# Altium PCB MPPT.PcbDoc
Units mil, origin at the board's own origin, x right, y up, seen from the top; angles counter-clockwise.
Board outline 6000 x 4000 mil, 2 copper layers (Top Layer, Bottom Layer); 77 components, 41 nets, 232 pads, 0 vias.
Unrouted connection lines stored in the file: 164.
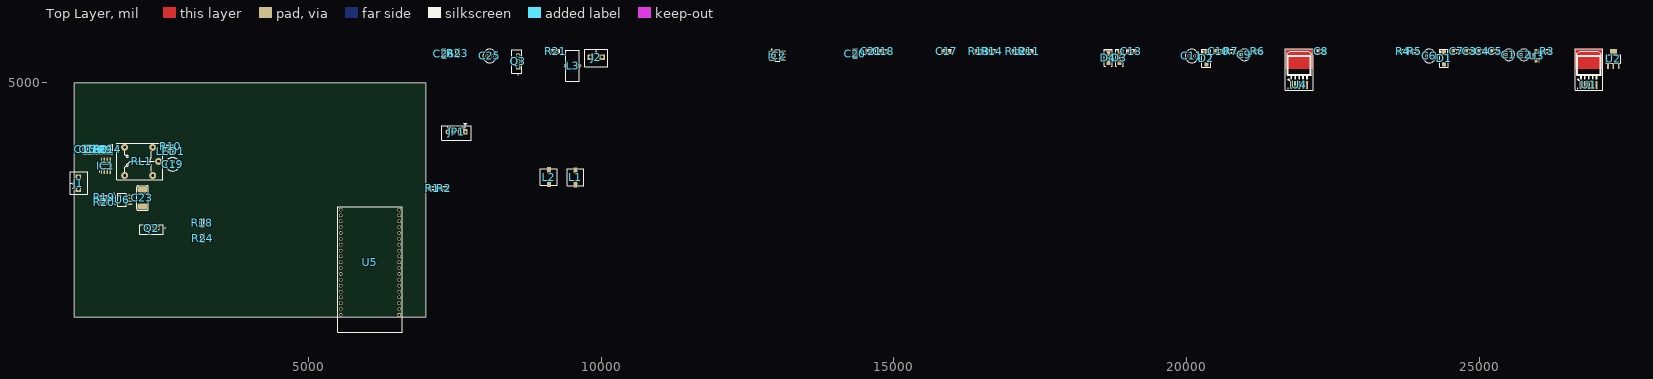
[diagram p0: Top Layer view]
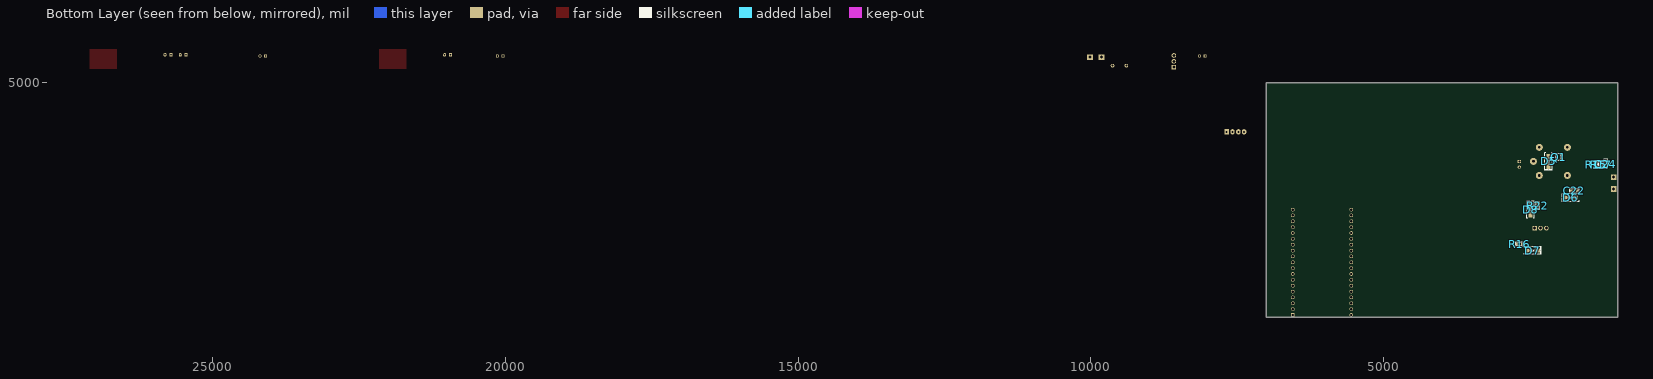
[diagram p1: Bottom Layer view, seen from below]

## Layer stack, top to bottom
Top Solder: solder mask 0.4, Solder Resist, Dk 3.5
Top Layer: signal copper 1.4
Dielectric 1: dielectric 12.6, FR-4, Dk 4.8
Bottom Layer: signal copper 1.4
Bottom Solder: solder mask 0.4, Solder Resist, Dk 3.5

## Board outline
1000,1000 7000,1000 7000,5000 1000,5000

## Design rules (kind name [scope] priority, off if disabled: settings)
Clearance [All] p1: gap=10 ignorepadtopadclearanceinfootprint=FALSE except(0: Arc-Hole Track-Hole SMDPad-SMDPad SMDPad-Hole THPad-Hole Via-Hole Fill-Hole Poly-Hole Region-Hole Text-Hole)
PolygonConnect [All] p1: connectstyle=Relief reliefconductorwidth=10 reliefentries=4 polygonreliefangle="90 Angle" airgapwidth=10
RoutingVias [All] p1: holewidth=28 width=50 viastyle="Through Hole" minholewidth=28 minwidth=50 maxholewidth=28 maxwidth=50
SolderMaskExpansion [All] p1: expansion=4 istentingtop=FALSE
Width [All] p1: maxlimit=10 minlimit=10 preferedwidth=10
30 further rules are at their usual default settings.

## Components (designator, comment, footprint, x,y, rotation, side; value= is the part's Value field where it differs from the comment)
C1 "220uF" C5mm 25500,5480 r0 top
C2 "220uF" C5mm 25760,5480 r0 top
C3 "100nF" CAP_0805 24830,5545 r0 top value=33p
C4 "10uF" CAP_0805 25045,5545 r0 top value=33p
C5 "100nF" CAP_0805 25265,5545 r0 top value=33p
C6 "470uF" C8mm 24140,5460 r0 top
C7 "100nF" CAP_0805 24610,5545 r0 top value=33p
C8 "100nF" CAP_0805 22295,5545 r0 top value=33p
C9 "220uF" C5mm 20985,5480 r0 top
C10 "100nF" CAP_0805 20550,5545 r0 top value=33p
C11 "470uF" C8mm 20085,5460 r0 top
C12 "100nF" CAP_0805 1365,3870 r90 top value=33p
C13 "100nF" CAP_0805 19055,5545 r0 top value=33p
C14 "10nF" CAP_0805 1620,3870 r90 top value=33p
C15 "10uF" CAP_0805 1185,3870 r90 top value=33p
C16 "100nF" CAP_0805 1275,3870 r90 top value=33p
C17 "100nF" CAP_0805 15900,5545 r0 top value=33p
C18 "10nF" CAP_0805 14825,5545 r0 top value=33p
C19 "220uF" C8mm 2680,3610 r270 top
C20 "10uF" CAP_0805 14335,5500 r90 top value=33p
C21 "100nF" CAP_0805 14610,5545 r0 top value=33p
C22 "100nF" CAP_0805 1740,3154 r0 bottom value=33p
C23 "10uF" CAP_7343 2165,3030 r270 top
C24 "1uF" CAP_0805 1204,3615 r270 bottom value=33p
C25 "470uF" C8mm 8095,5460 r0 top
C26 "1uF" CAP_0805 7320,5500 r90 top value=33p
D1 "1N5822" SMA 24395,5420 r90 top value="Diode c?m 1N5408"
D2 "1N5822" SMA 20335,5420 r90 top value="Diode c?m 1N5408"
D3 "SS34 Diode 3A 40V" "DIODE SMA" 18850,5430 r90 top
D4 "SS34 Diode 3A 40V" "DIODE SMA" 18660,5430 r90 top
D5 "M7" "DIODE SMA" 2180,3660 r270 bottom
D6 "SS34 Diode 3A 40V" "DIODE SMA" 1803.74,3040 r0 bottom
D7 "SS34" "DIODE SMA" 2455,2135 r180 bottom
D8 "SS34" "DIODE SMA" 2490,2833.74 r90 bottom
IC1 "Current Sensor IC" SOIC-8 1540,3582.56 r90 top
IC2 "Current Sensor IC" SOIC-8 13010,5465 r0 top
J1 "KF2" KF2-5.08 1070,3290 r90 top
J2 "KF2" KF2-5.08 9915,5440 r0 top
JP1 "JP4" CON4 7680,4165 r180 top value="Connector 4"
L1 "33uH" L-SMD 9560,3395 r0 top value="150 mH"
L2 "33uH" L-SMD 9105,3400 r0 top value="150 mH"
L3 "180uH" L-DIP-M-13.5x6 9510,5295 r0 top value="150 mH"
LED1 "LED" LED-0805-Red 2605,3830 r0 top value="LED 3 ly Single Colour"
Q1 "2N222" SOT23D 2010,3730 r90 bottom value=C1815
Q2 "IRF2807" IRF2807 2319.21,2519.53 r180 top
Q3 "IRF2807" IRF2807 8580,5370 r90 top
R1 "1k" RES-SMD-0805 7125,3205 r0 top
R2 "3k" RES-SMD-0805 7320,3205 r0 top
R3 "10k" RES-SMD-0805 26160,5545 r0 top
R4 "1.5k" RES-SMD-0805 23700,5545 r0 top
R5 "13k" RES-SMD-0805 23895,5545 r0 top
R6 "10k" RES-SMD-0805 21215,5545 r0 top
R7 "10k" RES-SMD-0805 20760,5545 r0 top
R8 "3k" RES-SMD-0805 1455,3860 r270 top
R9 "10k" RES-SMD-0805 1535,3860 r90 top
R10 "1k" RES-SMD-0805 2650,3915 r0 top
R11 "1k" RES-SMD-0805 17310,5545 r0 top
R12 "0R" RES-SMD-0805 17090,5545 r0 top
R13 "3k" RES-SMD-0805 16460,5545 r0 top
R14 "10k" RES-SMD-0805 16680,5545 r0 top
R15 "10k" RES-SMD-0805 1365,3603.56 r270 bottom
R16 "100R" RES-SMD-0805 2675,2245 r180 bottom
R17 "1k" RES-SMD-0805 1285,3603.56 r270 bottom
R18 "100k" RES-SMD-0805 3190,2610 r270 top
R19 "10k" RES-SMD-0805 1515,3045 r0 top
R20 "10k" RES-SMD-0805 1515,2965 r0 top
R21 "10k" RES-SMD-0805 9220,5545 r0 top
R22 "100R" RES-SMD-0805 2365,2900 r90 bottom
R23 "2k" RES-SMD-0805 7550,5510 r90 top
R24 "100k" RES-SMD-0805 3195,2350 r90 top
RL1 "Relay 10A/12V" "RELAY 5" 2115,3660 r180 top value="Relay SPDT, 10A, 12V"
U1 "LM2596" TO263 26850,5200 r0 top
U2 "LM1117-ADJ" LM1117-SOP 27285,5340 r0 top
U3 "ADS1115IDGSR" VSOP-10_19.6_230_57X12_SMD 25975,5465 r90 top
U4 "LM2596" TO263 21905,5200 r0 top
U5 "ESP32-DEVKITC-32D" MODULE_ESP32-DEVKITC-32D 6050,1815 r180 top
U6 "IR2104" SO-8N 1816.14,3005 r0 top

## Footprints (in the part's own frame and the unit in brackets; to place one, negate y for a bottom-side part, rotate by r counter-clockwise, add the part's x,y. Pads: shape width x height; smd on the part's side, far side on the other; paste and mask are expansions set on the pad)
C5mm [mm]
  rect 1.3x1.5 hole 0.8: 1(-1.27,0)
  oval 1.3x1.5 hole 0.8: 2(1.27,0)
  silkscreen extent -2.51,-2.51 2.51,2.51, body extent -2.5,-2.5 2.49,2.5, height 11.01
C8mm [mm]
  rect 1.3x1.5 hole 0.8: 1(-1.25,0)
  oval 1.3x1.5 hole 0.8: 2(1.25,0)
  silkscreen extent -2.92,-2.92 2.92,2.92, body extent -3.15,-3.15 3.16,3.15, height 11.51
CAP_0805 [mm]
  rect 1.2x1.4 smd: 1(-1.27,-0.025) 2(1.27,-0.025)
  silkscreen extent -2.03,-0.91 2.03,0.86, body extent -1.01,-0.66 1.01,0.61, height 0.61
CAP_7343 [mm] "Capacitor Tantalum 7343"
  rrect50% 2.5x4.3 smd: 1(-3.81,0) 2(3.556,0)
  silkscreen extent -5.46,-2.54 5.21,2.54, body extent -3.81,-2.29 3.56,2.29, height 3
CON4 [mil] "CON4"
  rect 75x90 hole 34: 1(0,0)
  oval 75x90 hole 34: 2(100,0) 3(200,0) 4(300,0)
  silkscreen extent -100,-150 400,140, body extent -90,-90 398,136, height 276
"DIODE SMA" [mm] "SMA"
  rect 2.5x1.7 smd: 1(-2,0) 2(2,0)
  silkscreen extent -3.68,-1.65 3.75,1.65, body extent -2.6,-1.37 2.6,1.37, height 2.4
IRF2807 [mm]
  rect 2x2 hole 1.33: 1(-2.56,-0.012)
  round 2 hole 1.33: 2(-0.02,-0.012) 3(2.52,-0.012)
  silkscreen extent -5.89,-1.49 5.06,2.71, body extent -5.06,-1.4 5.1,2.8, height 20.57
KF2-5.08 [mm]
  rect 2.5x2.5 hole 1.3: 1(-2.54,0) 2(2.54,0)
  silkscreen extent -4.95,-4.08 4.95,3.43, body extent -5,-4.07 5,3.43, height 10
L-DIP-M-13.5x6 [mm] "Body 13.5x6mm, 2 leads"
  round 1.6 hole 0.85: 1(-3,0) 2(3,0)
  silkscreen extent -3,-6.75 3,6.75, body extent -3.62,-7.35 3.62,7.35, height 14.8
L-SMD [mm]
  rect 1.7x2.5 smd: 1(0,2.9) 2(0,-3.3)
  silkscreen extent -3.65,-3.85 3.65,3.45, body extent -3.65,-3.85 3.65,3.45, height 4.05
LED-0805-Red [mil]
  rect 50x55 smd: 1(0,0) 2(90,0)
  silkscreen extent 0,-35 90,35, body extent 5,-25 85,25, height 43
LM1117-SOP [mm]
  rect 0.7x2.54 smd: 1(-2.3,-1.27) 2(0,-1.27) 3(2.3,-1.27)
  rect 3x2.54 smd: 2(0,4.826)
  silkscreen extent -3.17,0 3.17,3.56, body extent -3.25,-1.78 3.25,5.18, height 1.68
MODULE_ESP32-DEVKITC-32D [mm]
  rect 1.56x1.56 hole 1.04: 1(-12.7,19.76)
  round 1.56 hole 1.04: 2(-12.7,17.22) 3(-12.7,14.68) 4(-12.7,12.14) 5(-12.7,9.6) 6(-12.7,7.06) 7(-12.7,4.52) 8(-12.7,1.98) 9(-12.7,-0.56) 10(-12.7,-3.1) 11(-12.7,-5.64) 12(-12.7,-8.18) 13(-12.7,-10.72) 14(-12.7,-13.26) 15(-12.7,-15.8) 16(-12.7,-18.34) 17(-12.7,-20.88) 18(-12.7,-23.42) 19(-12.7,-25.96) 20(12.7,19.76) 21(12.7,17.22) 22(12.7,14.68) 23(12.7,12.14) 24(12.7,9.6) 25(12.7,7.06) 26(12.7,4.52) 27(12.7,1.98) 28(12.7,-0.56) 29(12.7,-3.1) 30(12.7,-5.64) 31(12.7,-8.18) 32(12.7,-10.72) 33(12.7,-13.26) 34(12.7,-15.8) 35(12.7,-18.34) 36(12.7,-20.88) 37(12.7,-23.42) 38(12.7,-25.96)
  silkscreen extent -13.95,-27.25 13.95,27.15, body extent -13.97,-27.9 13.97,27.2, height 8.25
"RELAY 5" [mil] "Reley DPDT, 8 pin, 1A, W400mil, L800mil,H 300mil"
  round 120 hole 45: 1(-325,0) 2(255,240) 3(255,-240) 4(-225,-240) 5(-225,240)
  silkscreen extent -395,-310 385,310, body extent -371,-304 381,306, height 602
RES-SMD-0805 [mil]
  rect 39.37x55 smd: 1(-45,0) 2(45,0)
  silkscreen extent -70,-34 70,33, body extent -39,-25 39,25, height 31
SMA [mm]
  rect 2x1.7 smd: 1(-2.544,0) 2(2.544,0)
  silkscreen extent -3.94,-1.9 3.94,1.91, body extent -2.87,-1.4 2.87,1.4, height 2.29
SO-8N [mm] "SOP, 8-Leads, Body 5.3x5.3mm, Pitch 1.27mm, IPC Medium Density"
  oval 2.2x0.6 smd: 1(-3.4,1.905) 2(-3.4,0.635) 3(-3.4,-0.635) 4(-3.4,-1.905) 5(3.4,-1.905) 6(3.4,-0.635) 7(3.4,0.635) 8(3.4,1.905)
  silkscreen extent -3.52,-2.75 1.9,2.88, body extent -3.05,-2.54 3,2.48, height 1.6
SOIC-8 [mm] "SOIC, 8-Leads, Body 5,0x4,0mm (max), Pitch 1,27mm, IPC Medium Density"
  rect 2.2x0.6 smd: 1(-2.475,1.905) 2(-2.475,0.635) 3(-2.475,-0.635) 4(-2.475,-1.905) 5(2.475,-1.905) 6(2.475,-0.635) 7(2.475,0.635) 8(2.475,1.905)
  silkscreen extent -2.6,-2.5 0.98,2.88, body extent -3.2,-2.5 3.2,2.5, height 1.75
SOT23D [mm] "SOT 23C - 1-3-2 - BCE"
  rect 0.85x1.2 smd: 1(-0.95,-1.25) 2(0.94,-1.245) 3(0,1.25)
  silkscreen extent -1.5,-1.14 1.5,1.32, body extent -1.5,-1.17 1.5,1.33, height 1.06
TO263 [mm]
  rrect50% 1x3.4 smd: 1(-3.019,-5.969) 2(-1.319,-5.969) 4(2.081,-5.969) 5(3.781,-5.969)
  rrect50% 1x3.4 smd mask+0: 3(0.381,-5.969)
  Top Layer region: -5.568,1.016 6.432,1.016 6.432,9.65 -5.568,9.65
  silkscreen extent -5.57,-8.35 6.43,9.65, body extent -4.73,-6.84 5.43,7.8, height 4.57
VSOP-10_19.6_230_57X12_SMD [mm] "VSOP Package"
  rect 1.45x0.3 smd mask+0.076: 1(-2.2,1)
  rect 1.47x0.3 smd mask+0.076: 2(-2.2,0.5) 3(-2.2,0) 4(-2.2,-0.5) 5(-2.2,-1) 6(2.2,-1) 7(2.2,-0.5) 8(2.2,0) 9(2.2,0.5) 10(2.2,1)
  silkscreen extent -1.15,-1.5 1.15,1.5, body extent -2.45,-1.5 2.45,1.5, height 1.07

## Part data
C1 C2 C9: library part "Cap Pol", "220uF 25V 6x7mm", LatestRevisionDate=17-Jul-2002, LatestRevisionNote="Re-released for DXP Platform.", PackageReference=POLAR0.8, Published=8-Jun-2000, Publisher="Altium Limited"
C3 C4 C5 C7 C8 C10 C12 C13 C14 C15 C16 C17 C18 C20 C21 C22 C24 C26: library part CapSMD, "Capacitor", LatestRevisionDate=17-Jul-2002, LatestRevisionNote="Re-released for DXP Platform.", PackageReference=RAD-0.3, Published=8-Jun-2000, Publisher="Altium Limited"
C6 C11 C19: library part "Cap Pol", "220uF 50V 8x12mm", LatestRevisionDate=17-Jul-2002, LatestRevisionNote="Re-released for DXP Platform.", PackageReference=POLAR0.8, Published=8-Jun-2000, Publisher="Altium Limited"
C23: library part CAP_TAN_SMD, "10uF 35V SMD7343"
C25: library part "Cap Pol", "470uF 50V 8x12mm", LatestRevisionDate=17-Jul-2002, LatestRevisionNote="Re-released for DXP Platform.", PackageReference=POLAR0.8, Published=8-Jun-2000, Publisher="Altium Limited"
D1 D2: "Schottky Rectifiers"
D3 D4 D5: library part "Diode M7 ( 4007 )", "Dán", Chung_Loai=Dán, Don_Vi=Con, Ma_Hang=MH000944, Ten_Linh_Kien="Diode M7 1N4007 SMD 1A 1000V"
D6 D7 D8: library part "Diode SS34 ( 1N5822 )", "Dán", Chung_Loai=Dán, Don_Vi=Con, Ma_Hang=MH002104, Ten_Linh_Kien="Diode SS34 3A 40V SMA ( 1N5822 SS34A)"
IC1 IC2: library part ACS712
J1 J2: Manufacturer="Würth Elektronik eiSos GmbH", partNo=691103110002, ComponentLink1 Description=Manufacturer, ComponentLink1URL=http://www.we-online.com, ComponentLink2 Description=Datasheet, ComponentLink2URL=http://katalog.we-online.de/em/datasheet/6911031100xx.pdf, Created by="Karrer Zheng", Created Date="29 October 2013", NoPins=2
JP1: library part Con4, "Connector 4"
L1 L2: library part "Inductor Ferit", "33uH CD74R 7x7x4mm"
L3: library part Inductor, "180uH 4A 13mm"
LED1: "LED Single colour Green and Red"
Q1: "NPN 600mW, ECB"
R1 R2 R3 R4 R5 R6 R7 R8 R9 R10 R11 R12 R13 R14 R15 R16 R17 R18 R19 R20 R21 R22 R23 R24: library part "Resistor - SMD", "Resistor", Manufacturer="Generic Components", Class=Passive, Published=08/06/2000, Publisher="Altium Hobart Technology Centre"
RL1: library part "Relay 5", "Relay SPDT,10A - 12VDC 5 Pin"
U1 U4: Max Input Voltage="12 V", Max Output Current="3 (6.0 peak) A", Max Output Voltage=mV, Temperature Range="-40 to +125 degC", Category=IC-Power, Min Input Voltage=mV, Min Output Voltage=mV, Mounting Technology="Surface Mount", Status=Unreleased, Supply Voltage=mV
U2: "800mA Low-Dropout Linear Regulator", Creator="Nguyen Ba Bien", Website=http://group3i.net
U3: library part IC_ADS1115IDGSR, "Analog to Digital Converters - ADC 16B ADC w/ Int MUX PGA Comp Osc & Ref", Alternate Part Number-1=NA, Case/Package=MSOP-10, Manufacturer="Texas Instruments", Supplier Part Number-1=595-ADS1115IDGSR, Manufacturer Part Number=ADS1115IDGSR, Supplier-1=Mouser
U5: "EVAL BOARD FOR ESP-WROOM-32", Package=None, Availability=Warning, Check_prices=https://www.snapeda.com/parts/ESP32-DEVKITC-32D/Espressif%20Systems/view-part/2777395/?ref=eda, MF="Espressif Systems", MP=ESP32-DEVKITC-32D, Price=None, Purchase-URL=https://pricing.snapeda.com/search/part/ESP32-DEVKITC-32D/?ref=eda, SnapEDA_Link=https://www.snapeda.com/parts/ESP32-DEVKITC-32D/Espressif%20Systems/view-part/2777395/?ref=snap
U6: library part IR2184, "Half-Bridge Driver"

## Nets (pads, with @x,y where several pads share a name; then routed paths per layer and width w, separated by ;. In a path a pad name is that pad's centre, name@x,y a point inside that pad or via, vN(x,y) a via of type N, cw(c..) or ccw(c..) an arc to the next point about the centre after c; other vN are vias at no path point)
+3V3: C8.2 R6.1 R7.1 U5.1
+3V3a: C2.1 C5.1 C7.1 R3.1 U2.2 U3.8
+5: C1.1 C3.1 C4.1 C13.2 C15.1 C16.1 C20.1 C21.1 IC1.8 IC2.8 JP1.2 L1.2 R2.2 U2.3 U5.19
+12: C9.1 C10.1 C22.1 D5.2 D6.1 L2.2 R5.2 RL1.5 U6.1
ADC_ALRT: R3.2 U3.2
ADC_I_BAT: R13.1 R14.2 U3.7
ADC_I_SOLAR: R8.1 R9.2 U3.5
ADC_SCL: R6.2 U3.10 U5.22
ADC_SDA: R7.2 U3.9 U5.25
ADC_V_BAT: C26.1 R21.2 R23.1 U3.6
ADC_V_SOLAR: C24.1 R15.1 R17.1 U3.4
BAT+: D3.1 IC2.3 IC2.4 J2.1
BAT-: C1.2 C2.2 C3.2 C4.2 C5.2 C6.2 C8.1 C9.2 C10.2 C11.2 C13.1 C19.2 C22.2 C24.2 C25.2 C26.2 D1.1 D2.1 J1.1 J2.2 JP1.1 LED1.2 Q1.2 Q3.3 R1.1 R4.1 R12.2 R17.2 R19.1 R20.1 R23.2 R24.2 U1.3 U1.5 U2.1 U4.3 U4.5 U5.14 U5.20 U5.26 U6.4
GND_ANALOG: C7.2 C12.2 C14.2 C15.2 C16.2 C17.2 C18.2 C20.2 C21.2 IC1.5 IC2.5 R9.1 R12.1 R14.1 U3.1 U3.3
I2C_SCL: JP1.4 U5.31
I2C_SDA: JP1.3 U5.30
IR2104_EN: R20.2 U5.7 U6.3
IR2104_PWM: R19.2 U5.8 U6.2
NetC6_1: C6.1 C11.1 D3.2 D4.2 U1.1 U4.1
NetC12_1: C12.1 IC1.7 R8.2
NetC14_1: C14.1 IC1.6
NetC17_1: C17.1 IC2.7 R13.2
NetC18_1: C18.1 IC2.6
NetC19_1: C19.1 Q2.2 RL1.1
NetC23_1: C23.1 D6.2 U6.8
NetC23_2: C23.2 L3.1 Q2.3 Q3.2 R18.2 U6.6
NetC25_1: C25.1 IC2.1 IC2.2 L3.2 R21.1
NetD1_2: D1.2 L1.1 U1.2
NetD2_2: D2.2 L2.1 U4.2
NetD5_1: D5.1 Q1.3 RL1.4
NetD7_1: D7.1 Q2.1 R16.1 R18.1
NetD7_2: D7.2 R16.2 U6.7
NetD8_1: D8.1 Q3.1 R22.1 R24.1
NetD8_2: D8.2 R22.2 U6.5
NetIC1_3: IC1.3 IC1.4 RL1.3
NetLED1_1: LED1.1 R10.1
NetQ1_1: Q1.1 R11.1
NetR1_2: R1.2 R2.1 U1.4
NetR4_2: R4.2 R5.1 U4.4
RELAY: R10.2 R11.2 U5.9
SOLAR+: D4.1 IC1.1 IC1.2 J1.2 R15.2
pads on no net: RL1.2 U5.2 U5.3 U5.4 U5.5 U5.6 U5.10 U5.11 U5.12 U5.13 U5.15 U5.16 U5.17 U5.18 U5.21 U5.23 U5.24 U5.27 U5.28 U5.29 U5.32 U5.33 U5.34 U5.35 U5.36 U5.37 U5.38